# Altium PCB 四层板V3.0（改4s电池的那版）.PcbDoc (part 2 of 2)
Units mil, origin at the board's own origin, x right, y up, seen from the top; angles counter-clockwise.
Board outline 3411.06 x 2789.06 mil, 4 copper layers (Top Layer, GND, POW, Bottom Layer), stack 23.756 mil thick; 112 components, 75 nets, 401 pads, 165 vias.
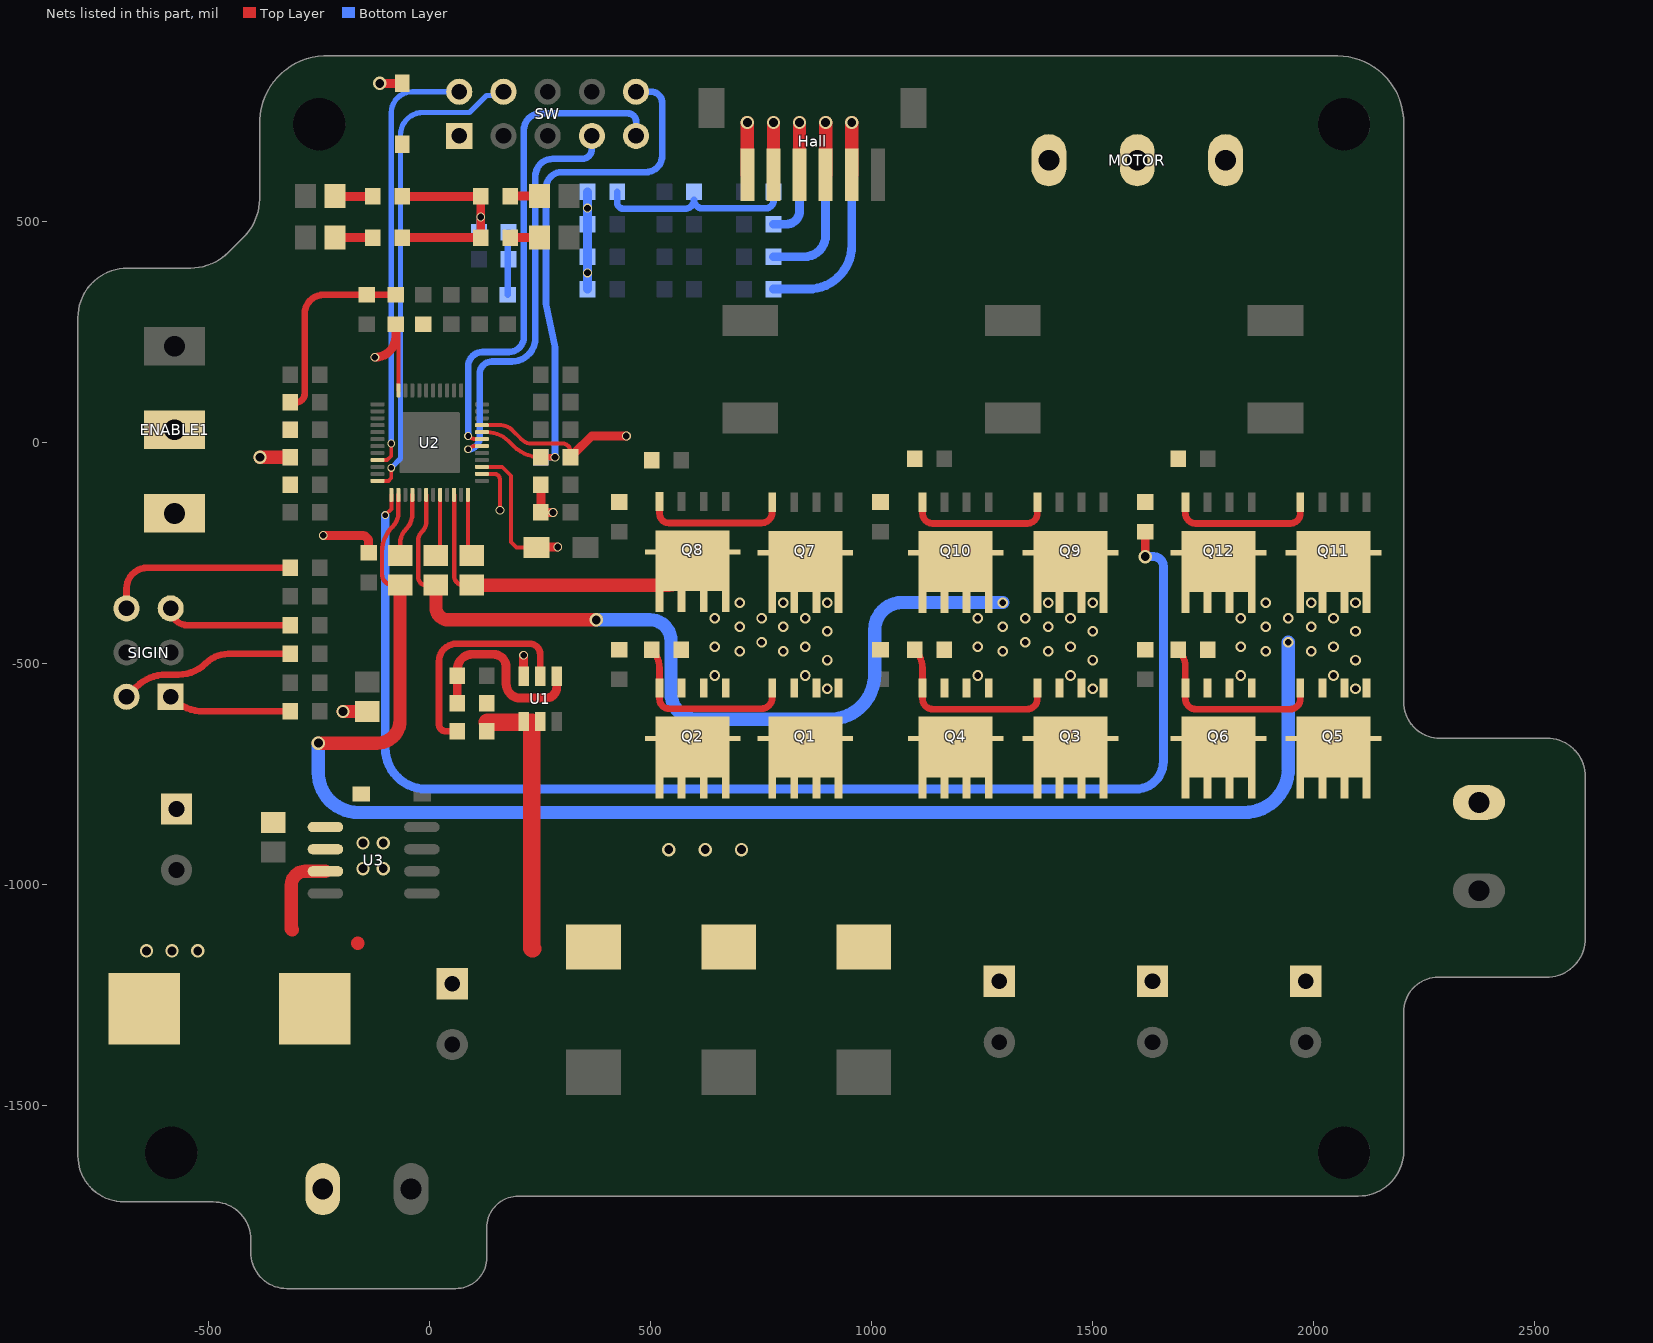
[diagram p4: the nets of this part, all layers, seen from the top]

## Via types
v1: diameter 24, hole 15, Top Layer to Bottom Layer, 54 vias
v2: diameter 30, hole 20, Top Layer to Bottom Layer, 39 vias
v3: diameter 18, hole 13, Top Layer to Bottom Layer, 30 vias
v4: diameter 20, hole 15, Top Layer to Bottom Layer, 27 vias
v5: diameter 28, hole 15, Top Layer to Bottom Layer, 6 vias
v6: diameter 24, hole 18, Top Layer to Bottom Layer, 4 vias
v7: diameter 25, hole 18, Top Layer to Bottom Layer, 2 vias
v8: diameter 28, hole 20, Top Layer to Bottom Layer, 2 vias
v9: diameter 20, hole 13, Top Layer to Bottom Layer, 1 vias

## Nets (pads, with @x,y where several pads share a name; then routed paths per layer and width w, separated by ;. In a path a pad name is that pad's centre, name@x,y a point inside that pad or via, vN(x,y) a via of type N, cw(c..) or ccw(c..) an arc to the next point about the centre after c; other vN are vias at no path point) (continued)
LOC: R51.1 U2.37 | length 2979.6
  Top Layer w9: v3(-100.61,-164.17) -86.61,-150.17 U2.37@-86.61,-118.11
  Top Layer w20: v2(1618.95,-258) R51.1@1618.95,-201.46
  Bottom Layer w20: v3(-100.61,-164.17) -100.61,-690.96 ccw(c-7.57,-690.96) -7.57,-784 1597.31,-784 ccw(c1597.31,-721.31) 1660,-721.31 1660,-279.94 ccw(c1638.06,-279.94) 1638.06,-258 v2(1618.95,-258)
NetC10_2: C10.2 Hall.5 R15.1 R21.2 | length 713.9
  Top Layer w30: Hall.5@777.78,606.01 v2(777.78,724.42)
  Bottom Layer w15: R15.1@424.04,567.33 424.04,543.96 ccw(c439,543.96) 439,529 577.6,529 ccw(c577.6,549.44) 598.04,549.44 ccw(c617.48,549.44) 617.48,530 760,530 ccw(c760,548.04) 778.04,548.04 R21.2@778.04,567.33
  Bottom Layer w20: R21.2@777.78,567.59 v2(777.78,724.42)
  Bottom Layer w30: R21.2@777.78,567.59 R21.2@778.04,567.33
NetC11_1: C11.1 U2.48 | length 151.1
  Top Layer w10: U2.48@86.61,-118.11 86.61,-256.6 ccw(c94.61,-256.6) C11.1@94.61,-264.6
NetC12_1: C12.1 U2.44 | length 152.9
  Top Layer w9: C12.1@14,-265.54 ccw(c14,-255.91) 23.62,-255.91 U2.44@23.62,-118.11
NetC13_1: C13.1 U2.40 | length 144.8
  Top Layer w10: C13.1@-67,-255.54 -67,-228.53 cw(c-19.58,-228.53) -53.11,-194.99 ccw(c-86.28,-161.82) -39.37,-161.82 U2.40@-39.37,-118.11
NetD4_A: D4.A SW.1
NetD5_K: D5.K L1.2 U3.2
  other v2: -641,-1150 -583,-1150 -525,-1150 -151,-964 -105,-964 -151,-906 -105,-906
NetEN1_1: EN1.1 R8.2 | length 85.1
  Top Layer w20: EN1.1@-214.13,464.01 R8.2@-129.06,464.01
NetENABLE1_2: ENABLE1.2 R40.2 R42.2 | length 0.2
  Top Layer w40: ENABLE1.2@-577.06,28.98 ENABLE1.2@-577.06,29.2
NetERR1_1: ERR1.1 R2.2 | length 70.6
  Top Layer w20: R2.2@182.41,557.01 cw(c183.41,557.01) 183.41,558.01 ERR1.1@252.48,558.01
NetHall_2: Hall.2 R28.2 | length 630.1
  Top Layer w30: Hall.2@954.94,606.01 v2(954.94,724.42)
  Bottom Layer w20: R28.2@778.04,347.33 856.31,347.33 ccw(c856.31,445.96) 954.94,445.96 v2(954.94,724.42)
NetHall_3: Hall.3 R23.2 | length 519.3
  Top Layer w30: Hall.3@895.89,606.01 v2(895.89,724.42)
  Bottom Layer w20: R23.2@778.04,420.66 847.7,420.66 ccw(c847.7,468.85) 895.89,468.85 v2(895.89,724.42)
NetHall_4: Hall.4 R22.2 | length 394.7
  Top Layer w30: Hall.4@836.83,606.01 v2(836.83,724.42)
  Bottom Layer w20: R22.2@778.04,493.99 806.73,493.99 ccw(c806.73,524.1) 836.83,524.1 v2(836.83,724.42)
NetPOW1_1: POW1.1 R1.2 | length 85.6
  Top Layer w20: POW1.1@-214.13,558.01 ccw(c-213.13,558.01) -213.13,557.01 R1.2@-129.06,557.01
NetQ1_2: Q1.2 Q2.2 R43.2 R46.2 | length 419.8
  Top Layer w15: R46.2@502.54,-468.94 cw(c460.49,-510.98) 519.95,-510.98 Q2.2@519.95,-555.08 519.95,-580.17 ccw(c541.78,-580.17) 541.78,-601.99 750.48,-601.99 ccw(c750.48,-577.52) 774.95,-577.52 Q1.2@774.95,-555.08
NetQ3_2: Q3.2 Q4.2 R44.2 R47.2 | length 426.7
  Top Layer w15: R47.2@1097.54,-468.94 cw(c1055.49,-510.98) 1114.95,-510.98 Q4.2@1114.95,-555.08 1114.95,-579.63 ccw(c1138.32,-579.63) 1138.32,-602.99 1351.92,-602.99 ccw(c1351.92,-579.96) 1374.95,-579.96 Q3.2@1374.95,-555.08
NetQ5_2: Q5.2 Q6.2 R45.2 R48.2 | length 426.5
  Top Layer w15: R48.2@1693.49,-468.94 cw(c1653.74,-508.69) 1709.95,-508.69 Q6.2@1709.95,-555.08 1709.95,-579.63 ccw(c1733.32,-579.63) 1733.32,-602.99 1946.92,-602.99 ccw(c1946.92,-579.96) 1969.95,-579.96 Q5.2@1969.95,-555.08
NetQ7_2: Q7.2 Q8.2 R49.2 R52.2 | length 329
  Top Layer w15: Q8.2@519.95,-135.08 519.95,-160.17 ccw(c541.78,-160.17) 541.78,-181.99 750.48,-181.99 ccw(c750.48,-157.52) 774.95,-157.52 Q7.2@774.95,-135.08
NetQ9_2: Q9.2 Q10.2 R50.2 R53.2 | length 335.9
  Top Layer w15: Q10.2@1114.95,-135.08 1114.95,-159.63 ccw(c1138.32,-159.63) 1138.32,-182.99 1351.92,-182.99 ccw(c1351.92,-159.96) 1374.95,-159.96 Q9.2@1374.95,-135.08
NetQ11_2: Q11.2 Q12.2 R51.2 R54.2 | length 335.9
  Top Layer w15: Q12.2@1709.95,-135.08 1709.95,-159.63 ccw(c1733.32,-159.63) 1733.32,-182.99 1946.92,-182.99 ccw(c1946.92,-159.96) 1969.95,-159.96 Q11.2@1969.95,-135.08
NetR3_1: R3.1 U1.2 | length 508.2
  Top Layer w15: R3.1@62.48,-653 36,-653 cw(c36,-638) 21,-638 21,-495 cw(c61,-495) 61,-455 226,-455 cw(c226,-478.94) 249.94,-478.94 U1.2@249.94,-528.64
NetR4_1: R4.1 R6.1 U1.1 | length 433.1
  Top Layer w20: R4.1@62.48,-590 R6.1@62.48,-528 62.48,-513.28 cw(c96.76,-513.28) 96.76,-479 144.31,-479 cw(c144.31,-507.69) 173,-507.69 173,-546 ccw(c205,-546) 205,-578 263.19,-578 ccw(c263.19,-553.84) 287.35,-553.84 U1.1@287.35,-528.64
NetR7_2: R7.2 RUN1.1 | length 66.1
  Top Layer w20: R7.2@182.41,464.01 RUN1.1@248.48,464.01
NetR19_1: R19.1 SIGIN.1 | length 280
  Top Layer w15: SIGIN.1@-586.06,-574.99 -582.29,-578.76 ccw(c-511.58,-508.05) -511.58,-608.05 R19.1@-315.46,-608.05
NetR20_1: R20.1 SIGIN.2 | length 399.7
  Top Layer w15: SIGIN.2@-686.06,-574.99 -664.3,-553.24 cw(c-596.11,-621.43) -596.11,-524.99 -568.88,-524.99 ccw(c-568.88,-436.22) -506.11,-498.99 cw(c-455.54,-549.56) -455.54,-478.05 R20.1@-315.46,-478.05
NetR30_2: R30.2 SIGIN.5 | length 292.3
  Top Layer w15: SIGIN.5@-586.06,-374.99 ccw(c-548,-374.99) -548,-413.05 R30.2@-315.52,-413.05
NetR31_1: R31.1 SIGIN.6 | length 442.1
  Top Layer w15: SIGIN.6@-686.06,-374.99 -686.06,-330.61 cw(c-638.49,-330.61) -638.49,-283.05 R31.1@-315.46,-283.05
NetR34_1: R34.1 R36.2 R37.1 | length 142.5
  Bottom Layer w15: R34.1@176.89,334.41 176.89,474.48 cw(c178.41,474.48) R36.2@178.41,476
NetR35_1: R35.1 R38.2 R39.1 | length 454.8
  Top Layer w15: R35.1@-315.41,91.61 -301.39,91.61 ccw(c-301.39,110) -283,110 -283,291.16 cw(c-239.7,291.16) -239.7,334.46 R38.2@-77,334.46
RST: C19.2 R59.1 SW.10 U2.8 | length 1323.3
  Top Layer w9: U2.8@118.11,23.62 129.21,23.62 cw(c129.21,-46.79) 179,3 189.5,-7.5 ccw(c251.54,54.53) R59.1@251.54,-33.2
  Top Layer w15: R59.1@251.54,-33.2 251.73,-33 v4(283.59,-33)
  Bottom Layer w15: C19.2@251.37,-33 v4(283.59,-33) 283.59,214 263,315.9 263,576 cw(c299,576) 299,612 489.03,612 ccw(c489.03,648.97) 526,648.97 526,768.41 ccw(c500.41,768.41) 500.41,794.01 SW.10@466.94,794.01
RX: SW.9 U2.7 | length 1141.3
  Top Layer w9: v3(87.05,14.87) ccw(c103.95,31.77) 103.95,7.87 U2.7@118.11,7.87
  Bottom Layer w15: v3(87.05,14.87) 87.05,172.67 cw(c119.38,172.67) 119.38,205 179,205 ccw(c179,239) 213,239 213,707 cw(c251,707) 251,745 448.55,745 cw(c448.55,726.6) 466.94,726.6 SW.9@466.94,694.01
SWCLK: SW.4 U2.36 | length 1100.1
  Top Layer w9: U2.36@-118.11,-86.61 -93.61,-86.61 -87,-80 v3(-87,-57)
  Bottom Layer w12: v3(-87,-57) -66,-36 -66,696.1 cw(c-15.1,696.1) -15.1,747 90,747 128.58,785.58 158.52,785.58 SW.4@166.94,794.01
SWDIO: SW.2 U2.33 | length 992.4
  Top Layer w9: U2.33@-118.11,-39.37 -96.37,-39.37 -87,-30 v3(-87,-2)
  Bottom Layer w12: v3(-87,-2) -87,746.05 cw(c-39.05,746.05) -39.05,794.01 SW.2@66.94,794.01
TX: SW.7 U2.6 | length 949.8
  Top Layer w9: v3(87,-15) cw(c104.2,-32.2) 104.2,-7.87 U2.6@118.11,-7.87
  Bottom Layer w15: v3(87,-15) ccw(c87,11.05) 113.05,11.05 113.05,155.64 cw(c141,155.64) 141,183.59 186.13,183.59 ccw(c186.13,236.46) 239,236.46 239,602.75 cw(c278.25,602.75) 278.25,642 344.8,642 ccw(c344.8,664.14) 366.94,664.14 SW.7@366.94,694.01
VCC5V: C15.1 C16.2 C17.2 C18.2 D4.K ENABLE1.3 Hall.6 R1.1 R2.1 R7.1 R8.1 R12.2 R13.2 R14.2 R15.2 R36.1 R38.1 R59.2 U2.3 U2.9 U2.23 | length 1937.1
  Top Layer w9: R38.1@-77,267.54 cw(c-77,261.4) -70.87,261.4 U2.23@-70.87,118.11 ; U2.3@118.11,-55.12 164.12,-55.12 184,-75 184,-225 196,-237 C15.1@241.88,-237 ; U2.9@118.11,39.37 160.96,39.37 cw(c160.96,3.96) 186,29 207.1,7.9 ccw(c231,31.8) 231,-2 300.81,-2 cw(c300.81,-19.66) 318.46,-19.66 318.46,-32.21 R59.2@318.46,-33.2
  Top Layer w20: v4(-124,193) ccw(c-124,240) -77,240 R38.1@-77,267.54 ; v2(-112.9,812.9) D4.K@-62.06,812.9 ; R8.1@-62.13,464.01 R7.1@115.48,464.01 v4(115.48,510.51) R2.1@115.48,557.01 R1.1@-62.13,557.01 ; C15.1@241.88,-237 242.58,-236.31 v4(289.69,-236.31) ; C17.2@251.54,-95.6 C16.2@251.54,-158 v4(279,-158) ; R59.2@318.46,-32.21 326.18,-24.5 327.17,-24.5 366.66,15 v4(445,15)
  Top Layer w30: Hall.6@718.72,606.01 v2(718.72,724.42)
  Bottom Layer w20: R36.1@111.48,476 115.48,480 v4(115.48,510.51) ; R12.2@357.11,347.33 v4(357.11,383.99) R13.2@357.11,420.66 R14.2@357.11,493.99 v4(357.11,530.66) R15.2@357.11,567.33
VCC12V: C2.1 C3.1 C4.1 C21.1 D1.K D2.K D3.K DCIN.1 L1.1 R3.2 R4.2 U1.4 U1.5 U3.3 | length 811.6
  Top Layer w30: -311,-1102 cw(c-311,-1100) -313,-1100 -313,-1001 cw(c-282,-1001) -282,-970 U3.3@-236,-970 ; -163,-1133 ccw(c-163,-1132) -162,-1132
  Top Layer w40: 130.89,-632.99 230.89,-632.99 230.89,-1142.89 ccw(c233,-1142.89) 233,-1145
VCC12VO: C1.1 C14.2 R5.1 U1.3 U2.2 | length 424.2
  Top Layer w9: U2.2@118.11,-70.87 145.87,-70.87 cw(c145.87,-84) 159,-84 v4(159,-153)
  Top Layer w20: v4(-241,-210) -153.45,-210 cw(c-153.45,-225.34) -138.11,-225.34 C14.2@-138.11,-249.53 ; U1.3@212.54,-528.64 v4(212.54,-481)
  Top Layer w30: v2(-383.8,-33.2) R5.1@-315.41,-33.2 ; v2(-196,-608.46) C1.1@-141.06,-608.46
VCC16V: 16v.2 C20.1 C22.1 Q1.1 Q2.1 Q3.1 Q4.1 Q5.1 Q6.1 U3.1
  other v2: 541,-921 623.33,-921 705.67,-921
VSA: C11.2 MOTOR.1 Q1.3 Q2.3 Q7.1 Q8.1 R46.1 U2.46 | length 765.6
  Top Layer w10: U2.46@55.12,-118.11 55.12,-301.27 ccw(c76.31,-301.27) 76.31,-322.46 C11.2@95,-322.46
  Top Layer w30: C11.2@95,-322.46 541.43,-322.46 ccw(c541.43,-268.94) Q8.1@594.95,-268.94
  other v1: 899.89,-556.99 644.89,-526.99 849.89,-526.99 899.89,-491.99 701.89,-471.99 799.89,-471.99 644.89,-461.99 849.89,-461.99 750.89,-451.99 899.89,-426.99 701.89,-416.99 799.89,-416.99 644.89,-396.99 750.89,-396.99 849.89,-396.99 701.89,-361.99 799.89,-361.99 899.89,-361.99
VSB: C12.2 MOTOR.2 Q3.3 Q4.3 Q9.1 Q10.1 R47.1 U2.42 | length 1964.3
  Top Layer w10: U2.42@-7.87,-118.11 -7.87,-178.7 cw(c-39.41,-178.7) -17.11,-200.99 ccw(c4.62,-222.72) -26.11,-222.72 -26.11,-304.57 ccw(c-8.22,-304.57) -8.22,-322.46 C12.2@14,-322.46
  Top Layer w30: C12.2@14,-322.46 14,-373 ccw(c42,-373) 42,-401 v2(377,-401)
  Bottom Layer w30: v2(377,-401) 498.67,-401 cw(c498.67,-448.33) 546,-448.33 546,-567.29 ccw(c604.71,-567.29) 604.71,-626 904.66,-626 ccw(c904.66,-523.66) 1007,-523.66 1007,-423.46 cw(c1068.47,-423.46) 1068.47,-361.99 v1(1296.89,-361.99)
  other v1: 1499.89,-556.99 1239.89,-526.99 1449.89,-526.99 1499.89,-491.99 1296.89,-471.99 1399.89,-471.99 1239.89,-461.99 1449.89,-461.99 1347.89,-451.99 1499.89,-426.99 1296.89,-416.99 1399.89,-416.99 1239.89,-396.99 1347.89,-396.99 1449.89,-396.99 1399.89,-361.99 1499.89,-361.99
VSC: C13.2 MOTOR.3 Q5.3 Q6.3 Q11.1 Q12.1 R48.1 U2.38 | length 3419.7
  Top Layer w10: U2.38@-70.87,-118.11 -70.87,-158.29 cw(c-115.71,-158.29) -84,-190 ccw(c-26.06,-247.94) -108,-247.94 -108,-297.42 ccw(c-82.96,-297.42) -82.96,-322.46 C13.2@-67,-322.46
  Top Layer w30: v2(-252,-680) -119,-680 ccw(c-119,-628) -67,-628 C13.2@-67,-322.46
  Bottom Layer w30: v2(-252,-680) -252,-746 ccw(c-161,-746) -161,-837 1842.89,-837 ccw(c1842.89,-737) 1942.89,-737 v1(1942.89,-451.99)
  other v1: 2094.89,-556.99 1834.89,-526.99 2044.89,-526.99 2094.89,-491.99 1891.89,-471.99 1994.89,-471.99 1834.89,-461.99 2044.89,-461.99 2094.89,-426.99 1891.89,-416.99 1994.89,-416.99 1834.89,-396.99 1942.89,-396.99 2044.89,-396.99 1891.89,-361.99 1994.89,-361.99 2094.89,-361.99
pads on no net: Hall.0 SW.6 SW.8

## Polygon pours and split planes (outlines as drawn)
no net on Top Layer "Top Layer-VSB 1" (hatched 90Degree grid 5 track 5, pour order 34): 422.94,-1063.05
no net on Bottom Layer "Bottom Layer-VSA 1" (hatched 90Degree grid 5 track 5, pour order 88): 2474.94,-665.94
no net on Bottom Layer "Bottom Layer-VSC 1" (hatched 90Degree grid 5 track 5, pour order 64): 500.94,-1608.94
no net on Bottom Layer "Bottom Layer-VSC 2" (hatched 90Degree grid 5 track 5, pour order 62): 518.94,-1617.94
no net on Bottom Layer "Bottom Layer-VSC 3" (hatched 90Degree grid 5 track 5, pour order 54): 549.94,-1666.94
GND on GND (split plane): 302 vertices, not listed, extent -776.02,-1893.96 2594.96,854.97
VCC12VO on POW (split plane): 214.91,-3.18 214.91,-364 215.26,-366.61 216.26,-369.04 217.87,-371.13 289.91,-443.18 289.91,-661.82 226.82,-724.91 -398.82,-724.91 -461.91,-661.82 -461.91,-6.18 -391.82,63.91 147.82,63.91
VCC16V on POW (split plane): -410.13,-742.13 -408.04,-743.74 -406.32,-744.45 -405.61,-744.74 -403,-745.09 733.82,-745.09 807.91,-819.18 807.91,-963.82 731.82,-1039.91 -588.82,-1039.91 -644.91,-983.82 -644.91,-805 -644.91,-747.18 -573.82,-676.09 -476.18,-676.09
VCC5V on POW (split plane): 302 vertices, not listed, extent -776.02,-1893.96 2594.96,854.97

## Keep-outs
Keep-Out Layer:
  lines w20: -796.06,-1613.56 ccw(c-691.61,-1613.56) -691.61,-1718 -489.9,-1718 cw(c-489.9,-1802.9) -405,-1802.9 -405,-1832.25 ccw(c-323.25,-1832.25) -323.25,-1914 59.43,-1914 ccw(c59.43,-1844.43) 129,-1844.43 129,-1776.98 cw(c200.98,-1776.98) 200.98,-1705 2101.22,-1705 ccw(c2101.22,-1602.28) 2203.94,-1602.28 2203.94,-1420.41 2203.94,-1287.51 cw(c2281.45,-1287.51) 2281.45,-1210 2526.26,-1210 ccw(c2526.26,-1121.26) 2615,-1121.26 2615,-755.72 ccw(c2528.28,-755.72) 2528.28,-669 2285.94,-669 cw(c2285.94,-587) 2203.94,-587 2203.94,722.01 ccw(c2052.87,723.98) 2054.84,875.06 -239.63,875.06 ccw(c-233.34,723.29) -385.11,717.01 -385.11,550.95 cw(c-505.82,550.95) -420.47,465.6 -455.7,430.36 cw(c-541.06,515.72) -541.06,395.01 -683.73,395.01 ccw(c-683.73,282.68) -796.06,282.68 -796.06,-1417.32 -796.06,-1613.56

## Other copper
Top Layer:
  region net VCC12V: -243,-1765 ccw(c-243,-1705) -183,-1705 -183,-1357 ccw(c-208,-1357) -208,-1332 -269,-1332 ccw(c-269,-1358) -295,-1358 -295,-1713 ccw(c-243,-1713)
  region net NetD5_K: -726,-1166 cw(c-668,-1166) -668,-1108 -538,-1108 cw(c-538,-1168) -478,-1168 -478,-1329 cw(c-513,-1329) -513,-1364 -725,-1364 cw(c-725,-1363) -726,-1363
  region net GND: 18,-864 63,-864 cw(c63,-885) 84,-885 84,-973 cw(c64,-973) 64,-993 20,-993 ccw(c20,-995) 18,-995
  region net NetD5_K: -168,-773 ccw(c-168,-782) -177,-782 -177,-879 cw(c-201,-879) -201,-903 -268,-903 ccw(c-268,-919) -284,-919 -284,-923 ccw(c-268,-923) -268,-939 -196,-939 cw(c-196,-957) -178,-957 -178,-974 ccw(c-157,-974) -157,-995 -96,-995 ccw(c-96,-975) -76,-975 -76,-785 ccw(c-88,-785) -88,-773
  region net VCC12V: -599,-1004
  region net GND: -52,-1034 15,-1034 ccw(c15,-1020) 29,-1020 29,-783 ccw(c16,-783) 16,-770 -43,-770 ccw(c-43,-790) -63,-790 -63,-1026
  region net VCC16V: -212,-886 ccw(c-212,-871) -197,-871 -197,-799 ccw(c-219,-799) -219,-777 -596,-777 ccw(c-596,-806) -625,-806 -625,-859 ccw(c-598,-859) -598,-886
  region net GND: 295,-1509 1277,-1509 ccw(c1277,-1409) 1377,-1409 1377,-1396 ccw(c1294,-1396) 1294,-1313 364,-1313 ccw(c364,-1382) 295,-1382
  region net VCC12V: 2078,-1087 cw(c2078,-1156) 2147,-1156 2147,-1176 cw(c2047,-1176) 2047,-1276 -102,-1276 ccw(c-102,-1308) -134,-1308 cw(c-210,-1308) -210,-1384 -350,-1384 cw(c-350,-1361) -373,-1361 -373,-1133 cw(c-327,-1133) -327,-1087
  region net VCC16V: 2132,-650 ccw(c2189,-650) 2189,-707 2479,-707 cw(c2479,-782) 2554,-782 2554,-829 cw(c2489,-829) 2489,-894 2234,-894 ccw(c2234,-951) 2177,-951 cw(c2150,-951) 2150,-978 554,-978 cw(c554,-878) 454,-878 454,-649
  region net GND: 1856,560 2101,560 cw(c2101,486) 2175,486 2175,328 cw(c2075,328) 2075,228 1884,228 cw(c1884,285) 1827,285 1827,529 cw(c1857,529) 1857,559
  region net GND: -163,-300 -127,-300 cw(c-127,-308) -119,-308 -119,-545 cw(c-139,-545) -139,-565 -171,-565 cw(c-171,-558) -178,-558 -178,-315 cw(c-163,-315)
  region net VSA: 548.89,-469.99 548.89,-236.99 cw(c585.89,-236.99) 585.89,-199.99 896.89,-199.99 cw(c896.89,-238.99) 935.89,-238.99 935.89,-569.99 cw(c923.89,-569.99) 923.89,-581.99 824.89,-581.99 cw(c824.89,-567.99) 810.89,-567.99 810.89,-507.99 ccw(c793.89,-507.99) 793.89,-490.99 700.89,-490.99 ccw(c700.89,-510.99) 680.89,-510.99 680.89,-575.99 cw(c672.89,-575.99) 672.89,-583.99 560.89,-583.99 cw(c560.89,-567.99) 544.89,-567.99 544.89,-289.99 cw(c563.89,-289.99) 563.89,-270.99
  region net A10: -266,-328 -232,-328 cw(c-232,-333) -227,-333 -227,-428 cw(c-233,-428) -233,-434 -261,-434 cw(c-261,-425) -270,-425 -270,-332 cw(c-266,-332)
  region net VCC5V: -96.5,252 -96.5,250 ccw(c-89.5,250) -89.5,243 -2.5,243 ccw(c-2.5,251) 5.5,251 5.5,284 ccw(c0.5,284) 0.5,289 -89.5,289 ccw(c-90.5,283) -96.5,284
  region net IA: 817.47,93.01 cw(c817.47,-6.99) 888.18,63.72 937.89,14.01 937.89,-152.99 cw(c924.89,-152.99) 924.89,-165.99 820.89,-165.99 cw(c820.89,-152.99) 807.89,-152.99 807.89,-106.99 ccw(c787.89,-106.99) 787.89,-86.99 703.89,-86.99 ccw(c703.89,-103.99) 686.89,-103.99 686.89,-147.99 cw(c672.89,-147.99) 672.89,-161.99 562.89,-161.99 cw(c562.89,-148.99) 549.89,-148.99 549.89,-15.41 cw(c649.89,-15.41) 579.18,55.3 647.89,93.01
  region net NetD4_A: -73.11,652.01 85.89,652.01 ccw(c85.89,678.01) 111.89,678.01 111.89,716.01 ccw(c98.89,716.01) 98.89,729.01 53,729.01 ccw(c53,653.9) -0.11,707.01 cw(c-19.42,726.32) -19.42,699.01 -71.11,699.01 ccw(c-71.11,688.01) -82.11,688.01 -82.11,662.01 ccw(c-72.61,661.51)
  region net NetENABLE1_2: -383.11,-73.99 cw(c-383.11,-46.99) -410.11,-46.99 -410.11,11.01 ccw(c-431.11,2.01) -440.11,23.01 -454.11,23.01 ccw(c-454.11,-24.99) -502.11,-24.99 -502.11,-73.99 ccw(c-461.11,-73.99) -461.11,-114.99 -302.11,-114.99 ccw(c-302.11,-106.99) -294.11,-106.99 -294.11,-80.99 ccw(c-301.11,-80.99) -301.11,-73.99
  region net NetENABLE1_2: -299.11,56.01 -435.1,56.01 cw(c-435.1,155.02) -505.11,85.01 -641.11,85.01 ccw(c-641.11,64.01) -662.11,64.01 -662.11,-10.99 ccw(c-651.11,-10.99) -651.11,-21.99 -506.11,-21.99 -503.4,-19.28 cw(c-432.69,-89.99) -432.69,10.01 -302.11,10.01 ccw(c-302.11,18.01) -294.11,18.01 -294.11,51.01 ccw(c-299.11,51.01)
  region net VSC: 1738.89,-469.99 1738.89,-236.99 cw(c1775.89,-236.99) 1775.89,-199.99 2086.89,-199.99 cw(c2086.89,-238.99) 2125.89,-238.99 2125.89,-569.99 cw(c2113.89,-569.99) 2113.89,-581.99 2014.89,-581.99 cw(c2014.89,-567.99) 2000.89,-567.99 2000.89,-507.99 ccw(c1983.89,-507.99) 1983.89,-490.99 1890.89,-490.99 ccw(c1890.89,-510.99) 1870.89,-510.99 1870.89,-575.99 cw(c1862.89,-575.99) 1862.89,-583.99 1750.89,-583.99 cw(c1750.89,-567.99) 1734.89,-567.99 1734.89,-289.99 cw(c1753.89,-289.99) 1753.89,-270.99
  region net ISUM: 655.89,391.01 cw(c715.63,366.26) 690.89,426.01 1552.89,426.01 cw(c1441.9,108.67) 1745,254.1 1937.4,72.77 ccw(c1959.42,154.03) 2001.31,81.01 2025.89,81.01 cw(c1953.5,80.99) 2004.68,29.79 1922.89,-51.99 1861.31,-51.99 cw(c1823.48,56.67) 1773.39,-46.91 1613.18,154.72 ccw(c1475.06,47.56) 1496.89,221.01 679.75,221.01 cw(c707.77,266.36) 655.89,254.1
  region net ISUM: 2006.47,93.01 cw(c2006.47,-6.99) 2077.18,63.72 2130.89,13.01 2130.89,-152.99 cw(c2115.89,-151) 2113.89,-165.99 2009.89,-165.99 cw(c2009.89,-152.99) 1996.89,-152.99 1996.89,-106.99 ccw(c1976.89,-106.99) 1976.89,-86.99 1892.89,-86.99 ccw(c1892.89,-103.99) 1875.89,-103.99 1875.89,-147.99 cw(c1861.89,-147.99) 1861.89,-161.99 1751.89,-161.99 cw(c1751.89,-148.99) 1738.89,-148.99 1738.89,-15.41 cw(c1838.89,-15.41) 1768.18,55.3 1836.89,93.01
  region net IB: 1411.47,93.01 cw(c1411.47,-6.99) 1482.18,63.72 1535.89,13.01 1535.89,-152.99 cw(c1520.89,-151) 1518.89,-165.99 1414.89,-165.99 cw(c1414.89,-152.99) 1401.89,-152.99 1401.89,-106.99 ccw(c1381.89,-106.99) 1381.89,-86.99 1297.89,-86.99 ccw(c1297.89,-103.99) 1280.89,-103.99 1280.89,-147.99 cw(c1266.89,-147.99) 1266.89,-161.99 1156.89,-161.99 cw(c1156.89,-148.99) 1143.89,-148.99 1143.89,-15.41 cw(c1243.89,-15.41) 1173.18,55.3 1241.89,93.01
  region net NetQ11_2: 1593.84,-122.99 cw(c1604.84,-122.99) 1604.84,-111.99 1637.84,-111.99 ccw(c1637.84,-79.99) 1669.84,-79.99 1669.84,-24.99 cw(c1681.84,-24.99) 1681.84,-12.99 1708.84,-12.99 cw(c1708.84,-22.99) 1718.84,-22.99 1718.84,-151.23 cw(c1709.9,-151.23) 1709.9,-160.17 1603.01,-160.17 cw(c1603.01,-150.99) 1593.84,-150.99
  region net NetQ9_2: 997.78,-123.46 cw(c1008.78,-123.46) 1008.78,-112.46 1041.78,-112.46 ccw(c1041.78,-80.46) 1073.78,-80.46 1073.78,-25.46 cw(c1085.78,-25.46) 1085.78,-13.46 1112.78,-13.46 cw(c1112.78,-23.46) 1122.78,-23.46 1122.78,-151.69 cw(c1113.84,-151.69) 1113.84,-160.63 1006.95,-160.63 cw(c1006.95,-151.46) 997.78,-151.46
  region net NetQ7_2: 403.89,-122.99 cw(c414.89,-122.99) 414.89,-111.99 447.89,-111.99 ccw(c447.89,-79.99) 479.89,-79.99 479.89,-24.99 cw(c491.89,-24.99) 491.89,-12.99 518.89,-12.99 cw(c518.89,-22.99) 528.89,-22.99 528.89,-151.23 cw(c519.95,-151.23) 519.95,-160.17 413.06,-160.17 cw(c413.06,-150.99) 403.89,-150.99
  region net NetQ5_2: 1594.84,-481.99 ccw(c1602.84,-481.99) 1602.84,-489.99 1701.84,-489.99 ccw(c1701.84,-476.99) 1714.84,-476.99 1714.84,-452.99 ccw(c1706.84,-452.99) 1706.84,-444.99 1601.84,-444.99 ccw(c1601.84,-451.99) 1594.84,-451.99
  region net NetQ3_2: 995.89,-481.99 ccw(c1003.89,-481.99) 1003.89,-489.99 1102.89,-489.99 ccw(c1102.89,-476.99) 1115.89,-476.99 1115.89,-452.99 ccw(c1107.89,-452.99) 1107.89,-444.99 1002.89,-444.99 ccw(c1002.89,-451.99) 995.89,-451.99
  region net NetQ1_2: 404.89,-481.99 ccw(c412.89,-481.99) 412.89,-489.99 511.89,-489.99 ccw(c511.89,-476.99) 524.89,-476.99 524.89,-452.99 ccw(c516.89,-452.99) 516.89,-444.99 411.89,-444.99 ccw(c411.89,-451.99) 404.89,-451.99
  region net VSB: 1143.89,-469.99 1143.89,-236.99 cw(c1180.89,-236.99) 1180.89,-199.99 1491.89,-199.99 cw(c1491.89,-238.99) 1530.89,-238.99 1530.89,-569.99 cw(c1518.89,-569.99) 1518.89,-581.99 1419.89,-581.99 cw(c1419.89,-567.99) 1405.89,-567.99 1405.89,-507.99 ccw(c1388.89,-507.99) 1388.89,-490.99 1295.89,-490.99 ccw(c1295.89,-510.99) 1275.89,-510.99 1275.89,-575.99 cw(c1267.89,-575.99) 1267.89,-583.99 1155.89,-583.99 cw(c1155.89,-567.99) 1139.89,-567.99 1139.89,-289.99 cw(c1158.89,-289.99) 1158.89,-270.99
  region net VCC12V: 116.94,-677 cw(c116.94,-669) 108.94,-669 108.94,-576 cw(c114.94,-576) 114.94,-570 142.94,-570 cw(c142.94,-576) 148.94,-576 148.94,-672 cw(c143.94,-672) 143.94,-677
  region net VCC12V: 262.99,-612.87 262.99,-651.87 cw(c257.99,-651.87) 257.99,-656.87 203.99,-656.87 cw(c203.99,-651.87) 198.99,-651.87 198.99,-613.87 cw(c203.99,-613.87) 203.99,-608.87 258.99,-608.87 cw(c258.99,-612.87)
  region: -266,-328
  region net VCC5V: -95,284
  region net NetQ1_2: 407.89,-114.99
  region net NetQ1_2: 409.89,-460.99
  region net NetQ1_2: 409.89,-460.99
  region net GND: 162.94,-185.05
  region: 236.21,-395.6
  region net NetENABLE1_2: -295.06,-80.05
  region net NetENABLE1_2: -299.06,-89.05
  region net ISUM: 484,-23.99
  region net ISUM: 527,-113.99
  region net ISUM: 2016.09,13.09
  region: 2151,-19.99
  region: 2144,-71.99
  region: 2679.94,464.06
  region: 365.89,-89.99
Bottom Layer:
  region net NetD5_K: -101,-885 cw(c-101,-905) -81,-905 -81,-1087 cw(c-181,-1087) -181,-1187 -650,-1187 cw(c-650,-1170) -667,-1170 -667,-1134 cw(c-649,-1134) -649,-1116 -273,-1116 ccw(c-273,-1016) -173,-1016 -173,-902 cw(c-156,-902) -156,-885
  region net VSB: 1558.89,-190.99 1558.89,-528.99 cw(c1489.89,-528.99) 1489.89,-597.99 1202.89,-597.99 cw(c1202.89,-538.99) 1143.89,-538.99 1143.89,-88.41 cw(c1243.89,-88.41) 1173.18,-17.7 1442.89,430.36 ccw(c1335.24,541.42) 1489.89,539.01 1493.89,751.01 cw(c1542.89,751.01) 1542.89,800.01 1630.89,800.01 cw(c1630.89,740.01) 1690.89,740.01 1690.89,84.43 cw(c1590.9,84.42) 1661.6,13.72 1589.18,-58.7 ccw(c1659.89,-129.41) 1559.89,-129.41 1559.89,-136.99
  region net VSA: 1460.89,767.01 1460.89,567.43 cw(c1360.91,567.42) 1431.6,496.72 975.89,-221.99 975.89,-492.99 cw(c891.39,-503.5) 901.89,-587.99 655.89,-587.99 cw(c655.89,-515.99) 583.89,-515.99 583.89,-109.99 cw(c794.01,-175.14) 691.5,19.5 1195,523 ccw(c1013.91,681.29) 1253.89,697.43 1253.89,762.01 cw(c1293.89,762.01) 1293.89,802.01 1413.89,802.01 cw(c1419.89,761.01)
  region net VSC: 2105.89,-581.99 1823.89,-581.99 cw(c1823.89,-481.99) 1723.89,-481.99 1723.89,752.01 cw(c1780.89,752.01) 1780.89,809.01 1931.89,809.01 cw(c1931.89,762.01) 1978.89,762.01 1978.89,430.36 ccw(c2262.34,420.36) 2054.84,227 cw(c1860.44,-3.49) 2160.89,22 2160.89,-526.99 cw(c2105.89,-526.99)
  region net VSB: 952.89,-578.99
  region: 2065.89,-254.99
  region: 2065.89,-254.99
  region: 1662.89,-248.99
  text "成都航院" at 933,-1305 h150
  text "逮虾户" at 931,-1430 h150
  text "2022" at 933,-1560 h150
POW (plane layer: these items are gaps in the copper):
  lines w20: -472,-666 -578,-666 -655,-743 -655,-805 -655,-988 -593,-1050 736,-1050 818,-968 818,-815 738,-735 231,-735 ; -472,-666 -403,-735 207,-735 231,-735 ; -472,-666 -472,-2 -396,74 152,74 225,1 225,-364 300,-439 300,-666 231,-735

## Silkscreen, mask and mechanical layers (free items; w line width, h text height)
Top Overlay:
  lines w10: -479.06,-436.99 -453.06,-410.99 ; -453.06,-537.99 -453.06,-410.99 ; -427.06,-436.99 -453.06,-410.99
  text "R" at 544,665 h70
  text "SPDOUT" at -738.05,-300.99 h30
  text "PWM" at -522.06,-300.99 h30
  text "开" at -482.06,-385.99 h70
  text "关" at -482.06,-612.99 h70
  text "DIROUT" at -733.06,-679.99 h30
  text "DIR" at -522.06,-679.99 h30
  text "+" at 2184,-850 h100
  text "_" at 2176,-1026 h100
  text "_" at 97,-1516 h100
  text "12v" at -195,-1541 h80
  text "+" at -436,-1556 h100
Bottom Overlay:
  text "B" at 1617.39,479.68 h100
  text "C" at 1840,478.02 h100
  text "A" at 1435,477 h100
Bottom Solder:
  text "成都航院" at 933,-1305 h150
  text "逮虾户" at 931,-1430 h150
  text "2022" at 933,-1560 h150